# Altium PCB UZ_PER_deskbench_terminal.PcbDoc
Units mm, origin at the board's own origin, x right, y up, seen from the top; angles counter-clockwise.
Board outline 51.71 x 126.29 mm, 4 copper layers (Top Layer, Layer 1, Layer 2, Bottom Layer), stack 1.611 mm thick; 14 components, 12 nets, 52 pads, 0 vias.
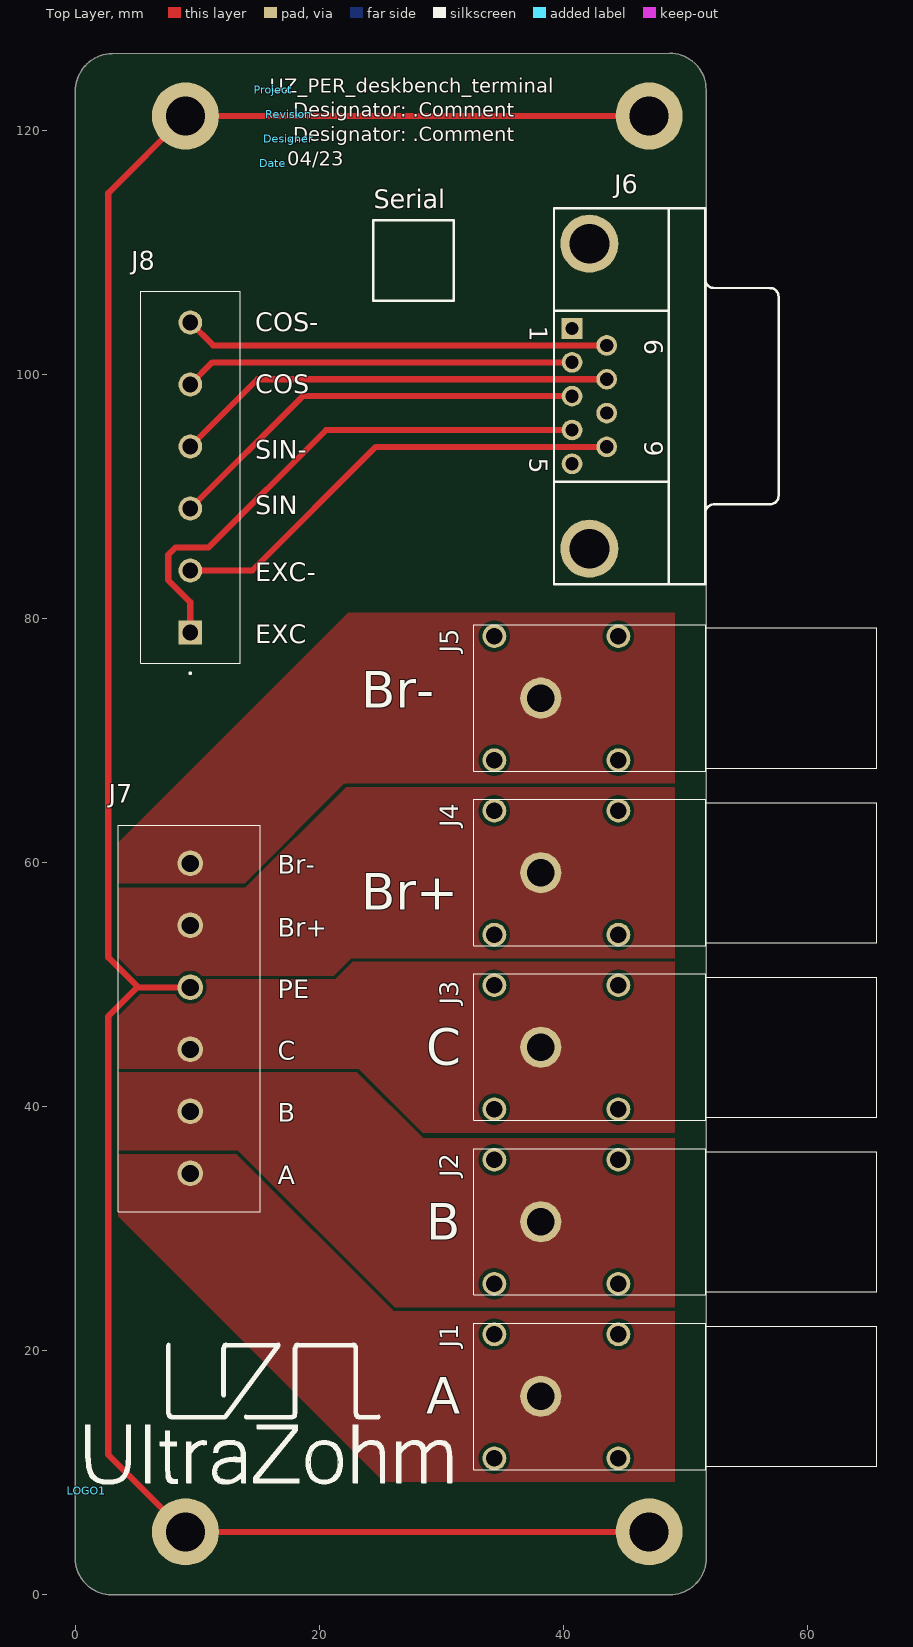
[diagram p0: Top Layer view]
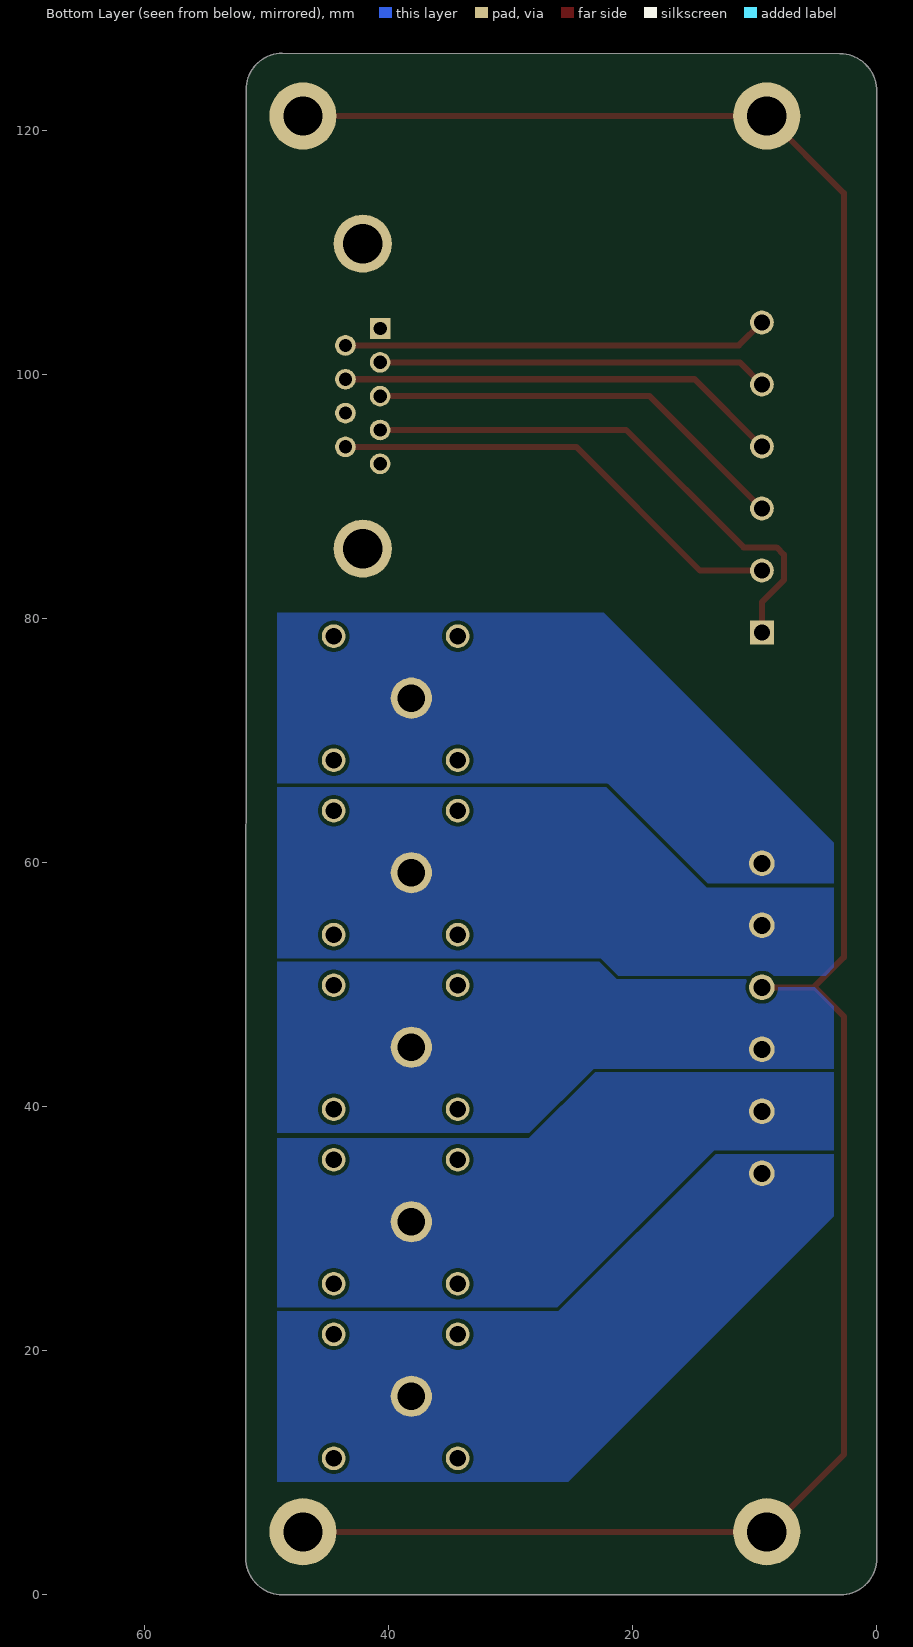
[diagram p1: Bottom Layer view, seen from below]
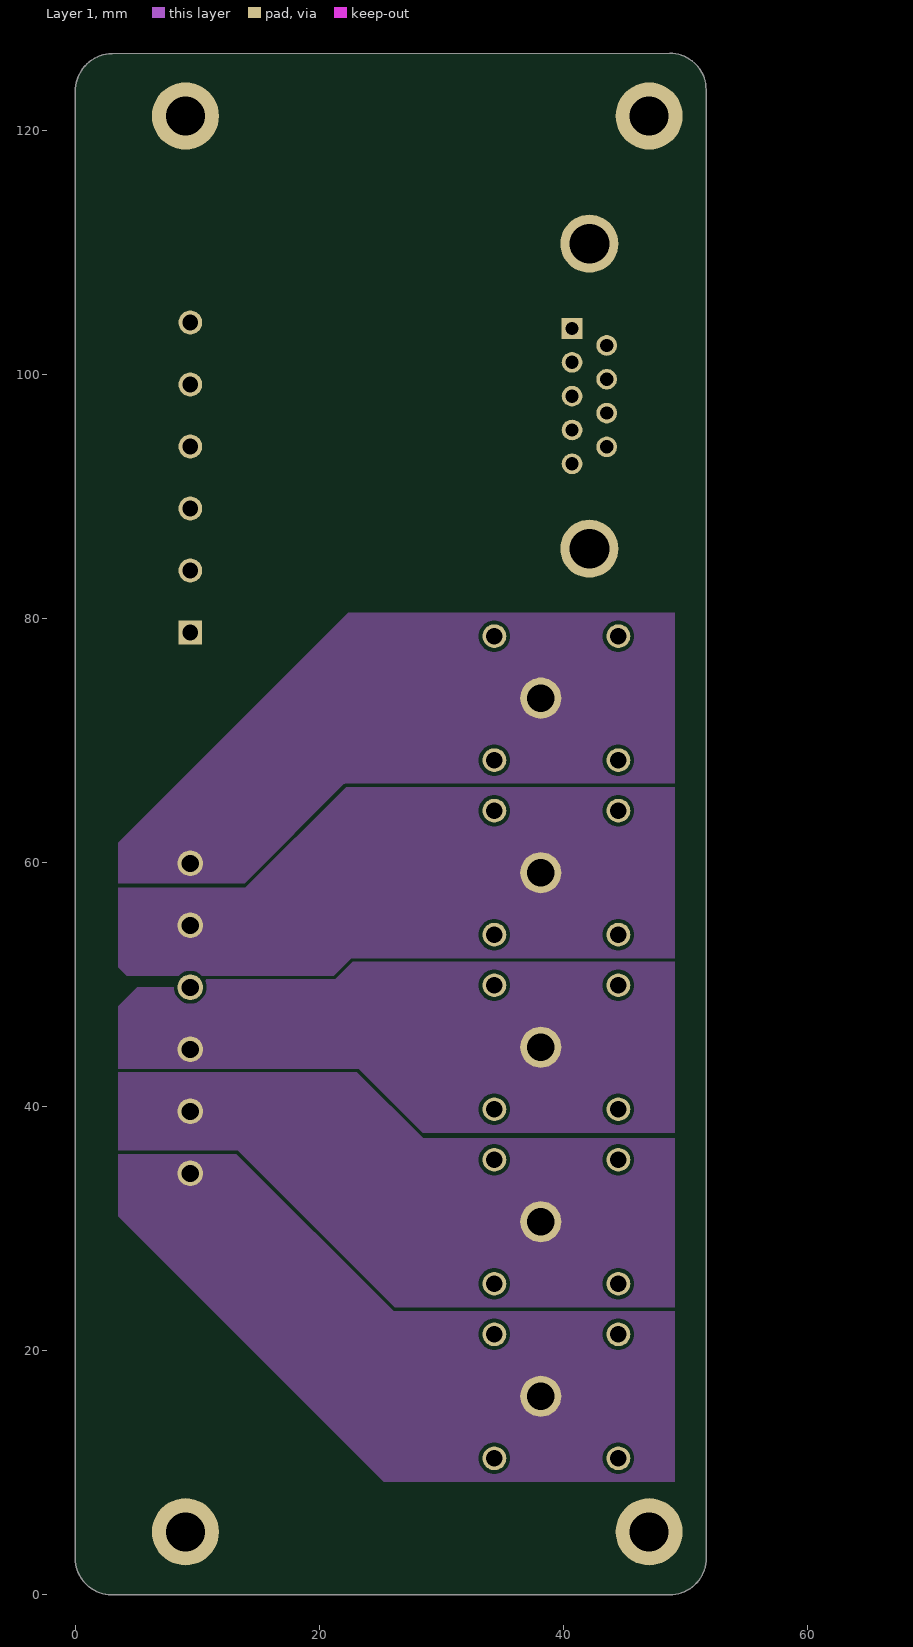
[diagram p2: Layer 1]
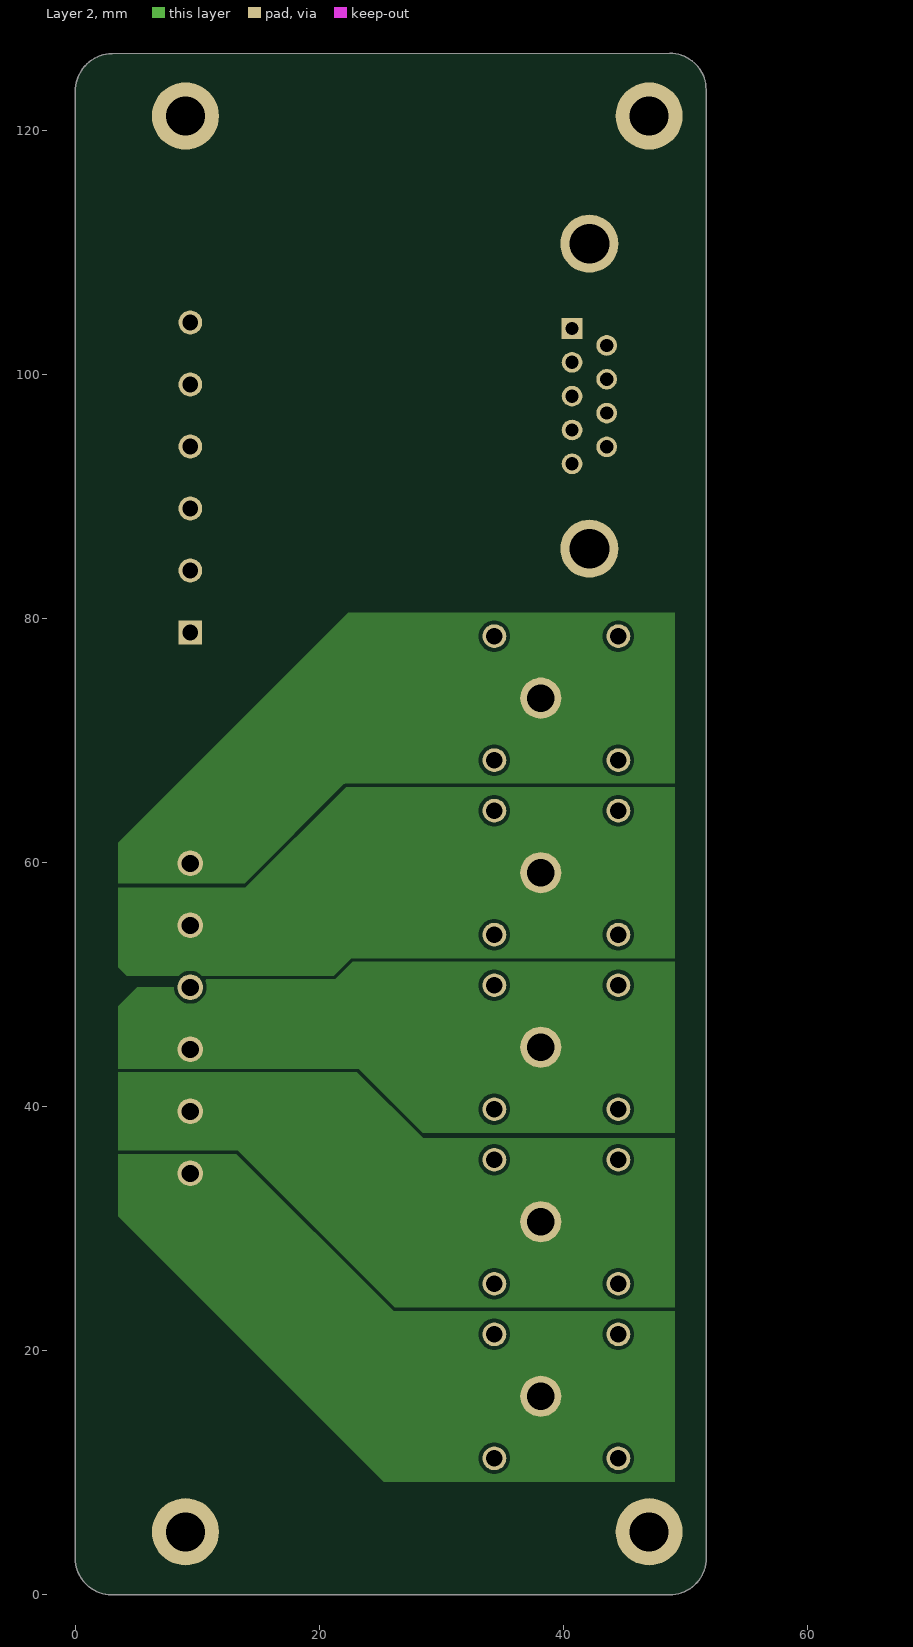
[diagram p3: Layer 2]
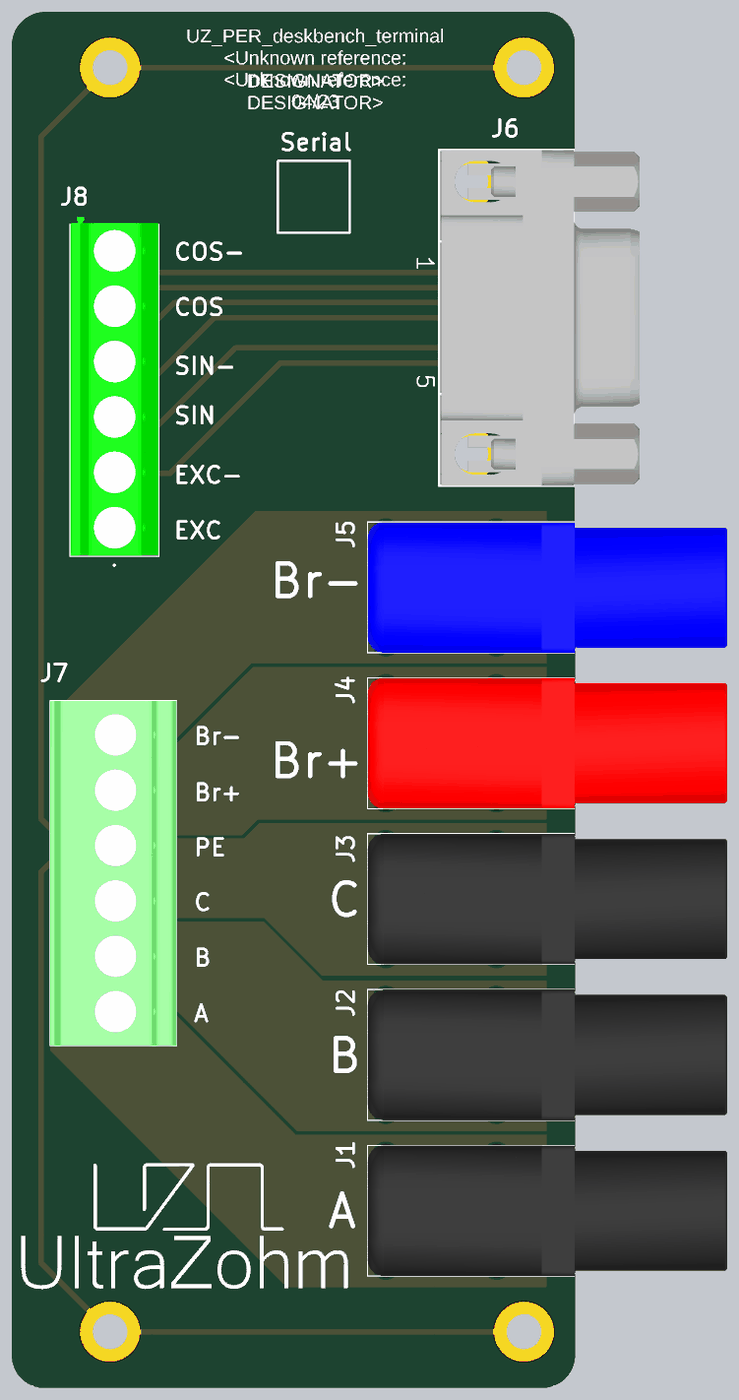
[diagram p4: 3D render of the assembled board from above, using the file's embedded part models]

## Layer stack, top to bottom
Top Solder: solder mask 0.01, Solder Resist, Dk 3.8
Top Layer: signal copper 0.035
Dielectric 2: prepreg 0.203, FR-4, Dk 4.6
Layer 1: signal copper 0.035
Dielectric 1: core 1.065, Core-036, Dk 4.6
Layer 2: signal copper 0.035
Dielectric 3: prepreg 0.203, FR-4, Dk 4.6
Bottom Layer: signal copper 0.035
Bottom Solder: solder mask 0.01, Solder Resist, Dk 3.8

## Board outline
-0.018,2.968 ccw(c2.951,2.968) 2.951,-0.001 48.682,0 ccw(c48.682,3.013) 51.695,3.013 51.665,123.316 ccw(c48.694,123.316) 48.694,126.286 3,126.259 ccw(c3.049,123.193) -0.018,123.145

## Design rules (kind name [scope] priority, off if disabled: settings)
AssemblyTestPointUsage [InNetClass('3V3_SingleEnded') or InNetClass('5V_SingleEnded') or InNetClass('15V_SingleEnded') or InNetClass('DifferentialSignals')] p1:
BoardOutlineClearance [All] p1: gap=0.5 ignorepadtopadclearanceinfootprint=FALSE except(0: Arc-SplitContinuation Track-SplitContinuation SMDPad-SplitContinuation THPad-SplitContinuation Via-SplitContinuation Fill-SplitContinuation Poly-SplitContinuation Region-SplitContinuation Text-SplitContinuation)
Clearance Clearance_Differential [InNetClass('DifferentialSignals')] p1: gap=0.1 ignorepadtopadclearanceinfootprint=TRUE except(0: Arc-Hole Track-Hole SMDPad-Hole THPad-Hole Via-Hole Fill-Hole Poly-Hole Region-Hole Text-Hole; 0.3: SMDPad-Via; 0.4: THPad-Via)
Clearance Clearance_Power [InNetClass('Power')] p2: gap=0.1 ignorepadtopadclearanceinfootprint=TRUE except(0: Arc-Hole Track-Hole SMDPad-Hole THPad-Hole Via-Hole Fill-Hole Poly-Hole Region-Hole Text-Hole; 0.3: Arc-Poly Track-Poly SMDPad-Poly THPad-Poly Via-Poly Fill-Poly Poly-Poly Poly-Region)
Clearance [All] p3: gap=0.1 ignorepadtopadclearanceinfootprint=TRUE except(0: Arc-Hole Track-Hole SMDPad-Hole THPad-Hole Via-Hole Fill-Hole Poly-Hole Region-Hole Text-Hole; 0.2: Track-Track Track-SMDPad Track-THPad Track-Via Track-Fill Track-Poly Track-Region Track-Text; 0.4: SMDPad-Via THPad-Via; 0.5: Poly-Poly)
ComponentClearance [All] p1: gap=0.1 collisioncheckmode=3 verticalgap=0.1 showdistances=FALSE
DiffPairsRouting [InNetClass('DifferentialSignals')] p1: maxlimit=0.25 minlimit=0.127 mostfreqgap=0.288 toplayer_maxgap=0.127 toplayer_prefgap=0.127 toplayer_minwidth=0.285 toplayer_maxwidth=0.285 toplayer_prefwidth=0.279 midlayer1_minwidth=0.069 midlayer1_maxwidth=0.15 midlayer1_prefwidth=0.15 midlayer2_mingap=0.165 midlayer2_minwidth=0.1 midlayer2_maxwidth=0.15 midlayer2_prefwidth=0.15 bottomlayer_maxgap=0.127 bottomlayer_prefgap=0.127 bottomlayer_minwidth=0.285 bottomlayer_maxwidth=0.285 bottomlayer_prefwidth=0.279 impedanceprofiledriven=TRUE impedanceprofileid={5F7DE71B-7B0B-4CDE-8AE7-8AD61221F3A5} impedanceprofilevalue=100.000000 maxuncoupledlength=12.7
FanoutControl Fanout_Power [InNetClass('Power') or InNet('ENABLE')] p1: bgadir=Out bgaviamode=Centered fanoutstyle=Auto fanoutdirection=None viagrid=0.025
FanoutControl Fanout_RS422 [InNetClass('DifferentialSignals')] p2: bgadir=Out bgaviamode=Closest fanoutstyle=Rows fanoutdirection=OutOnly viagrid=0.025
FanoutControl Fanout_BGA [IsBGA] p3 off: bgadir=Out bgaviamode=Centered fanoutstyle=Auto fanoutdirection=Alternating viagrid=0.025 // Fanout_BGA (Default Rule)
FanoutControl Fanout_LCC [IsLCC] p4 off: bgadir=Out bgaviamode=Centered fanoutstyle=Auto fanoutdirection=Alternating viagrid=0.025 // Fanout_LCC (Default Rule)
FanoutControl Fanout_SOIC [IsSOIC] p5 off: bgadir=Out bgaviamode=Centered fanoutstyle=Auto fanoutdirection=Alternating viagrid=0.025 // Fanout_SOIC (Default Rule)
FanoutControl Fanout_Small [(CompPinCount < 5)] p6 off: bgadir=Out bgaviamode=Centered fanoutstyle=Auto fanoutdirection=OutThenIn viagrid=0.025 // Fanout_Small (Default Rule)
FanoutControl Fanout_Default [All] p7: bgadir=NE bgaviamode=Closest fanoutstyle=Rows fanoutdirection=InOnly viagrid=0.025 // Fanout_Default (Default Rule)
Height [All] p1: minheight=0 maxheight=50 prefheight=12.7
HoleSize [All] p1: absolutevalues=TRUE maxlimit=4 minlimit=0.025 maxpercent=80.000 minpercent=20.000
PolygonConnect PolygonConnect_Therm [HoleSize > 2.6] p1: connectstyle=Direct reliefconductorwidth=0.254 reliefentries=4 polygonreliefangle="90 Angle" airgapwidth=0.254
PolygonConnect PolygonConnect_via [InPadClass('pad') or IsVia] p2: connectstyle=Direct reliefconductorwidth=0.254 reliefentries=4 polygonreliefangle="90 Angle" airgapwidth=0.254
PolygonConnect [All] p3: connectstyle=Relief reliefconductorwidth=0.3 reliefentries=4 polygonreliefangle="90 Angle" airgapwidth=0.25
RoutingLayers RoutingLayers_3V3Signals [InNetClass('3V3_SingleEnded')] p1 off: top layer_v5=TRUE mid layer 1_v5=TRUE mid layer 2_v5=TRUE bottom layer_v5=TRUE
RoutingLayers RoutingLayers_SingleEnded [InNetClass('15V_SingleEnded') or InNetClass('3V3_SingleEnded') or InNetClass('5V_SingleEnded')] p2 off: top layer_v5=TRUE mid layer 1_v5=TRUE mid layer 2_v5=TRUE bottom layer_v5=TRUE
RoutingLayers RoutingLayers_Differential [InNetClass('DifferentialSignals')] p3 off: top layer_v5=TRUE mid layer 1_v5=TRUE mid layer 2_v5=TRUE bottom layer_v5=FALSE
RoutingLayers [All] p4: top layer_v5=TRUE mid layer 1_v5=TRUE mid layer 2_v5=TRUE bottom layer_v5=TRUE
RoutingVias [All] p1: holewidth=0.3 width=0.5 viastyle="Through Hole" minholewidth=0.2 minwidth=0.4 maxholewidth=0.5 maxwidth=1
SolderMaskExpansion [All] p1: expansion=0.102 istentingtop=FALSE
UnRoutedNet UnRoutedNet_Signals [InNetClass('15V_SingleEnded') or InNetClass('3V3_SingleEnded') or InNetClass('5V_SingleEnded') or InNetClass('DifferentialSignals')] p1: checkbadconnections=TRUE
UnRoutedNet [All] p2: checkbadconnections=TRUE
Width Width_Power [InNetClass('Power')] p1: maxlimit=10 minlimit=0.2 preferedwidth=0.3 minimp=50.000000 maximp=50.000000 favimp=50.000000
Width [All] p2: maxlimit=10 minlimit=0.1 preferedwidth=0.3 toplayer_minwidth=0.2 midlayer1_prefwidth=0.15 midlayer2_prefwidth=0.15 bottomlayer_minwidth=0.2 minimp=50.000000 maximp=50.000000 favimp=50.000000
18 further rules are at their usual default settings.

## Classes and differential pairs
net class Power: Brake+ Brake- Phase_A Phase_B Phase_C
component class Connectors: J1 J2 J3 J4 J5 J6 J7 J8

## Components (designator, comment, footprint, x,y, rotation, side; value= is the part's Value field where it differs from the comment)
Date "04/23" COMMENT 16.192,117.296 r0 top
Designer "D. Hufnagel" Designator:comment 17.462,119.296 r0 top
J1 "Phase_A" FCR7350 49.1,16.253 r0 top value="PCB mount 4mm jack, Black	FCR7350B, 1000V, 24A"
J2 "Phase_B" FCR7350 49.1,30.553 r0 top value="PCB mount 4mm jack, Black	FCR7350B, 1000V, 24A"
J3 "Phase_C" FCR7350 49.1,44.853 r0 top value="PCB mount 4mm jack, Black	FCR7350B, 1000V, 24A"
J4 "Brake+" FCR7350 49.1,59.153 r0 top value="PCB mount 4mm jack, Red FCR7350R, 1000V, 24A"
J5 "Brake-" FCR7350 49.1,73.453 r0 top value="PCB mount 4mm jack, Blue FCR7350L, 1000V, 24A"
J6 "DSUB1.385-2H9" DSUB1.385-2H9 51.6,98.195 r270 top
J7 "1730434" 1730434 9.4,47.222 r270 top
J8 "1729160" 1729160 9.4,91.533 r90 top
LOGO1 "UZ Logo" UZ_Logo_small 0.9,8.5 r0 top
Project "UZ_PER_deskbench_terminal" COMMENT 16.192,123.296 r0 top
Revision "Rev01a" Designator:comment 17.462,121.296 r0 top
Serial "Serial #" SERIAL 26.4,111.4 r0 top

## Footprints (in the part's own frame and the unit in brackets; to place one, negate y for a bottom-side part, rotate by r counter-clockwise, add the part's x,y. Pads: shape width x height; smd on the part's side, far side on the other; paste and mask are expansions set on the pad)
1729160 [mm]
  rect 1.95x1.95 hole 1.3: 1(-12.7,0)
  round 1.95 hole 1.3: 2(-7.62,0) 3(-2.54,0) 4(2.54,0) 5(7.62,0) 6(12.7,0)
  silkscreen extent -16.1,-4.08 15.24,4.08, body extent -15.14,-4.05 15.91,4.05, height 10
1730434 [mm]
  round 2.1 hole 1.4: 1(-12.7,0) 2(-7.62,0) 3(-2.54,0) 4(2.54,0) 5(7.62,0) 6(12.7,0)
  silkscreen extent -15.83,-5.9 15.83,5.72, body extent -15.83,-5.9 15.83,5.72, height 18.74
COMMENT [mm] "prints out the comment of a component"
Designator:comment [mm] "prints out designator and comment of a component"
DSUB1.385-2H9 [mm] "Connector; D Subminiature; 9 Position; Right Angle; Pitch 1.385 mm"
  rect 1.69x1.69 hole 1.09: 1(-5.54,-10.92)
  round 1.69 hole 1.09: 2(-2.77,-10.92) 3(0,-10.92) 4(2.77,-10.92) 5(5.54,-10.92) 6(-4.155,-8.08) 7(-1.385,-8.08) 8(1.385,-8.08) 9(4.155,-8.08)
  round 4.76 hole 3.26: 10(-12.495,-9.5) 11(12.495,-9.5)
  silkscreen extent -15.4,-12.4 15.4,6, body extent -15.4,-12.2 15.41,6, height 12.8
FCR7350 [mil]
  round 132.87 hole 88.58: 1(-432.22,0)
  round 76.5 hole 53.15: 2(-581.83,200) 3(-581.83,-200) 4(-181.83,-200) 5(-181.83,200)
  silkscreen extent -649,-236 652,236, body extent -648,-236 651,236, height 485
SERIAL [mm]
  silkscreen extent -2,-5.4 4.6,1.2
UZ_Logo_small [mm] "logo width 3cm"
  silkscreen extent -0.05,0.57 29.94,12.12

## Part data
Date: library part 5, "Create a project parameter named \"FinDate\" this is the value of this component. It is printed on the PCB. Once the parameter is updated (e.g. new revision) it gets updated on the PCB as well", Manufacturer="PCB Manufacturer", Manufacturer Part Number="Project End Date", Component Type="Date of Project Finalization", Created from="T. Wendt", Created On="01.03.2021 09:01:41", Last Updated="01.03.2021 09:01:41", Live Cycle Status=1, PartID=5, Type="Standard (No BOM)"
Designer: library part 4, "Create a project parameter named \"Author\" this is the value of this component. It is printed on the PCB. Once the parameter is updated (e.g. new revision) it gets updated on the PCB as well", Manufacturer="PCB Manufacturer", Manufacturer Part Number="Project Author", Component Type="Project Author", Created from="T. Wendt", Created On="01.03.2021 08:53:41", Last Updated="01.03.2021 09:20:27", Live Cycle Status=1, PartID=4, Type="Standard (No BOM)"
J1 J2 J3: library part FCR7350B, "FCR7350B, 1000V, 24A, BLACK", Device Package=THT, Manufacturer=Cliff, Operating Temperature="-40°C - 80°C", Supplier Part Number 1=3185-FCR7350B-ND, Component Type="PCB mount 4mm jack, Black", ComponentLink1Description=datasheet, ComponentLink1URL=https://www.cliffuk.co.uk/products/testleads/sockets/S16NPC.pdf, ComponentLink2Description=drawing, ComponentLink2URL=https://media.digikey.com/pdf/Data%20Sheets/Cliff%20Electronic%20LTD%20PDF's/FCR7350_Drawing.pdf, Created from=DHufnagel, Created On="13.06.2022 10:18:11", Last Updated="28.06.2022 13:58:37", Live Cycle Status=1, Manufacturer Part Number=FCR7350B, Minimum Order=1, Mounting Type=THT, PartID=6, Series=S16N-PC, Stock number="not stored", Supplier 1=Digi-Key, Supplier 2=farnell, Supplier Part Number 2=1854507, Type="PCB mount 4mm jack, Black	FCR7350B, 1000V, 24A"
J4: library part FCR7350R, "FCR7350B, 1000V, 24A, RED", Device Package=THT, Manufacturer=Cliff, Operating Temperature="-40°C - 80°C", Supplier Part Number 1=3185-FCR7350R-ND, Component Type="PCB mount 4mm jack, Red", ComponentLink1Description=datasheet, ComponentLink1URL=https://www.cliffuk.co.uk/products/testleads/sockets/S16NPC.pdf, ComponentLink2Description=drawing, ComponentLink2URL=https://media.digikey.com/pdf/Data%20Sheets/Cliff%20Electronic%20LTD%20PDF's/FCR7350_Drawing.pdf, Created from=DHufnagel, Created On="13.06.2022 10:18:11", Last Updated="28.06.2022 13:58:37", Live Cycle Status=1, Manufacturer Part Number=FCR7350R, Minimum Order=1, Mounting Type=THT, PartID=7, Series=S16N-PC, Stock number="not stored", Supplier 1=Digi-Key, Supplier 2=farnell, Supplier Part Number 2=1854508, Type="PCB mount 4mm jack, Red FCR7350R, 1000V, 24A"
J5: library part FCR7350L, "FCR7350B, 1000V, 24A, BLUE", Device Package=THT, Manufacturer=Cliff, Operating Temperature="-40°C - 80°C", Supplier Part Number 1=3185-FCR7350L-ND, Component Type="PCB mount 4mm jack, Blue", ComponentLink1Description=datasheet, ComponentLink1URL=https://www.cliffuk.co.uk/products/testleads/sockets/S16NPC.pdf, ComponentLink2Description=drawing, ComponentLink2URL=https://media.digikey.com/pdf/Data%20Sheets/Cliff%20Electronic%20LTD%20PDF's/FCR7350_Drawing.pdf, Created from=DHufnagel, Created On="13.06.2022 10:18:11", Last Updated="28.06.2022 13:58:37", Live Cycle Status=1, Manufacturer Part Number=FCR7350L, Minimum Order=1, Mounting Type=THT, PartID=8, Series=S16N-PC, Stock number="not stored", Supplier 1=Digi-Key, Supplier 2=farnell, Supplier Part Number 2=1854511, Type="PCB mount 4mm jack, Blue FCR7350L, 1000V, 24A"
J6: "Connector; D Subminiature; 9 Position; Right Angle; Pitch 1.385 mm", Device Package=-, LCSC Part Number=C141882, Manufacturer="TE Connectivity", PackageDocument=O, Supplier Part Number 1=571-2311765-1, Component Type="DSUB Connector", ComponentLink1Description=Datasheet, ComponentLink1URL=https://www.mouser.de/datasheet/2/418/7/ENG_CD_2311765_D-2072985.pdf, Created from=MHlatky, Created On="26.01.2021 09:19:51", DatasheetDocument=1-Sep-1999, Gender=Receptacle, Last Updated="27.05.2022 15:54:50", LatestRevisionDate=17-Jul-2002, LatestRevisionNote="Re-released for DXP Platform.", Live Cycle Status=1, Manufacturer Part Number=DSUB1.385-2H9, Orientation="Right Angle", PackageReference=788750, PartID=5, Positions=9, Published=15-Jun-2001, Publisher="Altium Limited", Stock number="not stored", Supplier 1=Mouser, Type="DSUB Connector"
J7: "Fixed Mounting Block, 6 Pins, 5.08mm Pitch, 26-14 AWG", Device Package=Connector, Manufacturer="Phoenix Contact", Operating Temperature="-40 - 105  °C", Supplier Part Number 1=651-1730434, Component Type="Phoenix Connector", ComponentLink1Description=Homepage, ComponentLink1URL=https://www.phoenixcontact.com/us/products/1730434/pdf, Created from=DHufnagel, Created On="20.04.2023 12:39:10", Last Updated="20.04.2023 12:39:10", Live Cycle Status=1, Manufacturer Part Number=1730434, Mounting Type=THT, Number of positions=6, Number of rows=1, PartID=55, Stock number="not stored", Supplier 1=Mouser, Type=Connector
J8: "Fixed Mounting Block, 6 Pins, 5.08mm Pitch, 26-16 AWG", Device Package=Connector, Manufacturer="Phoenix Contact", Operating Temperature="-40 - 100  °C", Supplier Part Number 1=651-1729160, Component Type="Phoenix Connector", ComponentLink1Description=Homepage, ComponentLink1URL=https://www.phoenixcontact.com/us/products/1729160/pdf, Created from=DHufnagel, Created On="20.04.2023 12:39:10", Last Updated="20.04.2023 12:48:08", Live Cycle Status=1, Manufacturer Part Number=1729160, Mounting Type=THT, Number of positions=6, Number of rows=1, PartID=56, Stock number="not stored", Supplier 1=Mouser, Type=Connector
LOGO1: library part 1, "Official Project Logo of the UltraZohm", Manufacturer="PCB Manufacturer", Manufacturer Part Number="UltraZohm Logo", Component Type=Logo, ComponentLink1Description=Homepage, ComponentLink1URL=https://ultrazohm.com, Created from="T. Wendt", Created On="19.02.2021 16:55:56", Last Updated="02.03.2021 14:31:24", Live Cycle Status=1, PartID=1, Type="Standard (No BOM)"
Project: library part 2, "Create a project parameter named \"ProjectNameCustom\" this is the value of this component and it is printed on the PCB.", Manufacturer="PCB Manufacturer", Manufacturer Part Number="Project Name", Component Type="Project Name", Created from="T. Wendt", Created On="01.03.2021 08:43:57", Last Updated="01.03.2021 09:07:27", Live Cycle Status=1, PartID=2, Type="Standard (No BOM)"
Revision: library part 3, "Create a project parameter named \"ProjectRevision\" this is the value of this component. It is printed on the PCB. Once the parameter is updated (e.g. new revision) it gets updated on the PCB as well", Manufacturer="PCB Manufacturer", Manufacturer Part Number="Project Revision", Component Type="Project Revision", Created from="T. Wendt", Created On="01.03.2021 08:50:34", Last Updated="01.03.2021 09:28:36", Live Cycle Status=1, PartID=3, Type="Standard (No BOM)"
Serial: library part 6, "Field to put in a serial number", Manufacturer="PCB Manufacturer", Manufacturer Part Number="Serial Number", Component Type="Serial Number", Created from="T. Wendt", Created On="02.03.2021 14:31:24", Last Updated="02.03.2021 14:31:24", Live Cycle Status=1, PartID=6, Type="Standard (No BOM)"

## Free pads (board coordinates)
  round 5.5 hole 3.2: 1(9,5.15) 1(9,121.15) 1(47,5.15) 1(47,121.15)

## Nets (pads, with @x,y where several pads share a name; then routed paths per layer and width w, separated by ;. In a path a pad name is that pad's centre, name@x,y a point inside that pad or via, vN(x,y) a via of type N, cw(c..) or ccw(c..) an arc to the next point about the centre after c; other vN are vias at no path point)
Brake+: J4.1 J7.2
Brake-: J5.1 J7.1
COS: J6.2 J8.5 | length 32
  Top Layer w0.5: J8.5 11.212,100.965 J6.2
COS-: J6.6 J8.6 | length 34.9
  Top Layer w0.5: J8.6 11.283,102.35 J6.6
EXC: J6.4 J8.1 | length 44.4
  Top Layer w0.5: J8.1 9.4,81.318 7.6,83.118 7.6,85.2 8.2,85.8 10.9,85.8 20.525,95.425 J6.4
EXC-: J6.9 J8.2 | length 38.3
  Top Layer w0.5: J8.2 14.48,83.913 24.607,94.04 J6.9
PE: J7.3 pad.1 | length 203.5
  Top Layer w0.5: 5.062,49.762 2.68,47.38 2.68,11.47 9,5.15 pad.1@47,5.15 ; J7.3 5.138,49.762 2.68,52.22 2.68,57.661 2.68,114.83 9,121.15 pad.1@47,121.15
Phase_A: J1.1 J7.6
Phase_B: J2.1 J7.5
Phase_C: J3.1 J7.4
SIN: J6.3 J8.3 | length 35.1
  Top Layer w0.5: J8.3 18.602,98.195 J6.3
SIN-: J6.7 J8.4 | length 36.6
  Top Layer w0.5: J8.4@9.59,94.073 J8.4 14.907,99.58 J6.7
pads on no net: J1.2 J1.3 J1.4 J1.5 J2.2 J2.3 J2.4 J2.5 J3.2 J3.3 J3.4 J3.5 J4.2 J4.3 J4.4 J4.5 J5.2 J5.3 J5.4 J5.5 J6.1 J6.5 J6.8 J6.10 J6.11

## Polygon pours and split planes (outlines as drawn)
Brake+ on Top Layer "BRAKE+_L01_P026" (solid, pour order 26): 4.186,50.714 3.5,51.4 3.5,57.9 13.9,57.9 22.163,66.163 49.1,66.163 49.1,52.142 22.592,52.142 21.163,50.714
Phase_C on Top Layer "PHASE_C_L01_P027" (solid, pour order 27): 9.429,49.733 9.4,49.762 5.062,49.762 3.5,48.2 3.5,43.042 23.231,43.042 28.431,37.842 49.1,37.842 49.1,51.863 31.599,51.863 31.573,51.837 22.719,51.837 21.596,50.714 10.409,50.714
Brake- on Top Layer "BRAKE-_L01_P030" (solid, pour order 30): 13.844,58.3 21.987,66.442 49.1,66.442 49.1,80.463 22.363,80.463 3.5,61.6 3.5,58.3
Phase_B on Top Layer "PHASE_B_L01_P003" (solid, pour order 3): 3.5,42.8 23.061,42.8 28.486,37.375 49.1,37.375 49.1,23.542 26.158,23.542 13.3,36.4 3.5,36.4
Phase_A on Top Layer "PHASE_A_L01_P004" (solid, pour order 4): 25.257,9.242 3.5,31 3.5,36.124 13.228,36.124 26.088,23.263 49.1,23.263 49.1,9.242
Phase_A on Layer 1 "PHASE_A_L02_P036" (solid, pour order 36): 25.257,9.242 3.5,31 3.5,36.124 13.228,36.124 26.088,23.263 49.1,23.263 49.1,9.242
Phase_B on Layer 1 "PHASE_B_L02_P035" (solid, pour order 35): 3.5,42.8 23.061,42.8 28.486,37.375 49.1,37.375 49.1,23.542 26.158,23.542 13.3,36.4 3.5,36.4
Phase_C on Layer 1 "PHASE_C_L02_P038" (solid, pour order 38): 9.429,49.733 9.4,49.762 5.062,49.762 3.5,48.2 3.5,43.042 23.231,43.042 28.431,37.842 49.1,37.842 49.1,51.863 31.599,51.863 31.573,51.837 22.719,51.837 21.596,50.714 10.409,50.714
Brake+ on Layer 1 "BRAKE+_L02_P037" (solid, pour order 37): 4.186,50.714 3.5,51.4 3.5,57.9 13.9,57.9 22.163,66.163 49.1,66.163 49.1,52.142 22.592,52.142 21.163,50.714
Brake- on Layer 1 "BRAKE-_L02_P039" (solid, pour order 39): 13.844,58.3 21.987,66.442 49.1,66.442 49.1,80.463 22.363,80.463 3.5,61.6 3.5,58.3
Phase_A on Layer 2 "PHASE_A_L03_P041" (solid, pour order 41): 25.257,9.242 3.5,31 3.5,36.124 13.228,36.124 26.088,23.263 49.1,23.263 49.1,9.242
Phase_B on Layer 2 "PHASE_B_L03_P040" (solid, pour order 40): 3.5,42.8 23.061,42.8 28.486,37.375 49.1,37.375 49.1,23.542 26.158,23.542 13.3,36.4 3.5,36.4
Phase_C on Layer 2 "PHASE_C_L03_P043" (solid, pour order 43): 9.429,49.733 9.4,49.762 5.062,49.762 3.5,48.2 3.5,43.042 23.231,43.042 28.431,37.842 49.1,37.842 49.1,51.863 31.599,51.863 31.573,51.837 22.719,51.837 21.596,50.714 10.409,50.714
Brake+ on Layer 2 "BRAKE+_L03_P042" (solid, pour order 42): 4.186,50.714 3.5,51.4 3.5,57.9 13.9,57.9 22.163,66.163 49.1,66.163 49.1,52.142 22.592,52.142 21.163,50.714
Brake- on Layer 2 "BRAKE-_L03_P044" (solid, pour order 44): 13.844,58.3 21.987,66.442 49.1,66.442 49.1,80.463 22.363,80.463 3.5,61.6 3.5,58.3
Phase_A on Bottom Layer "PHASE_A_L04_P046" (solid, pour order 46): 25.257,9.242 3.5,31 3.5,36.124 13.228,36.124 26.088,23.263 49.1,23.263 49.1,9.242
Phase_B on Bottom Layer "PHASE_B_L04_P045" (solid, pour order 45): 3.5,42.8 23.061,42.8 28.486,37.375 49.1,37.375 49.1,23.542 26.158,23.542 13.3,36.4 3.5,36.4
Phase_C on Bottom Layer "PHASE_C_L04_P048" (solid, pour order 48): 9.429,49.733 9.4,49.762 5.062,49.762 3.5,48.2 3.5,43.042 23.231,43.042 28.431,37.842 49.1,37.842 49.1,51.863 31.599,51.863 31.573,51.837 22.719,51.837 21.596,50.714 10.409,50.714
Brake+ on Bottom Layer "BRAKE+_L04_P047" (solid, pour order 47): 4.186,50.714 3.5,51.4 3.5,57.9 13.9,57.9 22.163,66.163 49.1,66.163 49.1,52.142 22.592,52.142 21.163,50.714
Brake- on Bottom Layer "BRAKE-_L04_P049" (solid, pour order 49): 13.844,58.3 21.987,66.442 49.1,66.442 49.1,80.463 22.363,80.463 3.5,61.6 3.5,58.3

## Silkscreen, mask and mechanical layers (free items; w line width, h text height)
Top Overlay:
  text "COS-" at 14.729,103.529 h1.52
  text "COS" at 14.729,98.449 h1.52
  text "SIN-" at 14.729,93.057 h1.52
  text "SIN" at 14.729,88.504 h1.52
  text "EXC-" at 14.729,83.049 h1.52
  text "EXC" at 14.729,77.954 h1.52
  text "Br-" at 23.4,72.649 h3
  text "Br-" at 16.554,59.082 h1.52
  text "Br+" at 23.4,56.127 h3
  text "Br+" at 16.554,53.913 h1.52
  text "PE" at 16.554,48.866 h1.52
  text "C" at 16.554,43.842 h1.52
  text "C" at 28.75,43.38 h3
  text "B" at 16.554,38.751 h1.52
  text "A" at 16.554,33.646 h1.52
  text "B" at 28.75,29.075 h3
  text "A" at 28.75,14.818 h3
Mechanical 1:
  the board outline again, w0.102

## Dimensions
48.694,126.286 to 48.682,0 on Mechanical 2
-0.018,123.145 to 51.665,123.316 on Mechanical 2

## Text inside footprints (layer, text, board x,y; h text height)
J6: Top Overlay "1" at 37.225,103.985 h1.5 r270; Top Overlay "5" at 37.225,93.155 h1.5 r270; Top Overlay "9" at 46.625,94.54 h1.5 r270; Top Overlay "6" at 46.625,102.85 h1.5 r270
Serial: Mechanical 5 "SerialNr" at 30.2,107.6 h0.7 r180